# Altium PCB 400250.PcbDoc (part 2 of 2)
Units mm, origin at the board's own origin, x right, y up, seen from the top; angles counter-clockwise.
Board outline 46.04 x 15.24 mm, 2 copper layers (Top Layer, Bottom Layer), stack 1.97 mm thick; 97 components, 64 nets, 288 pads, 105 vias.
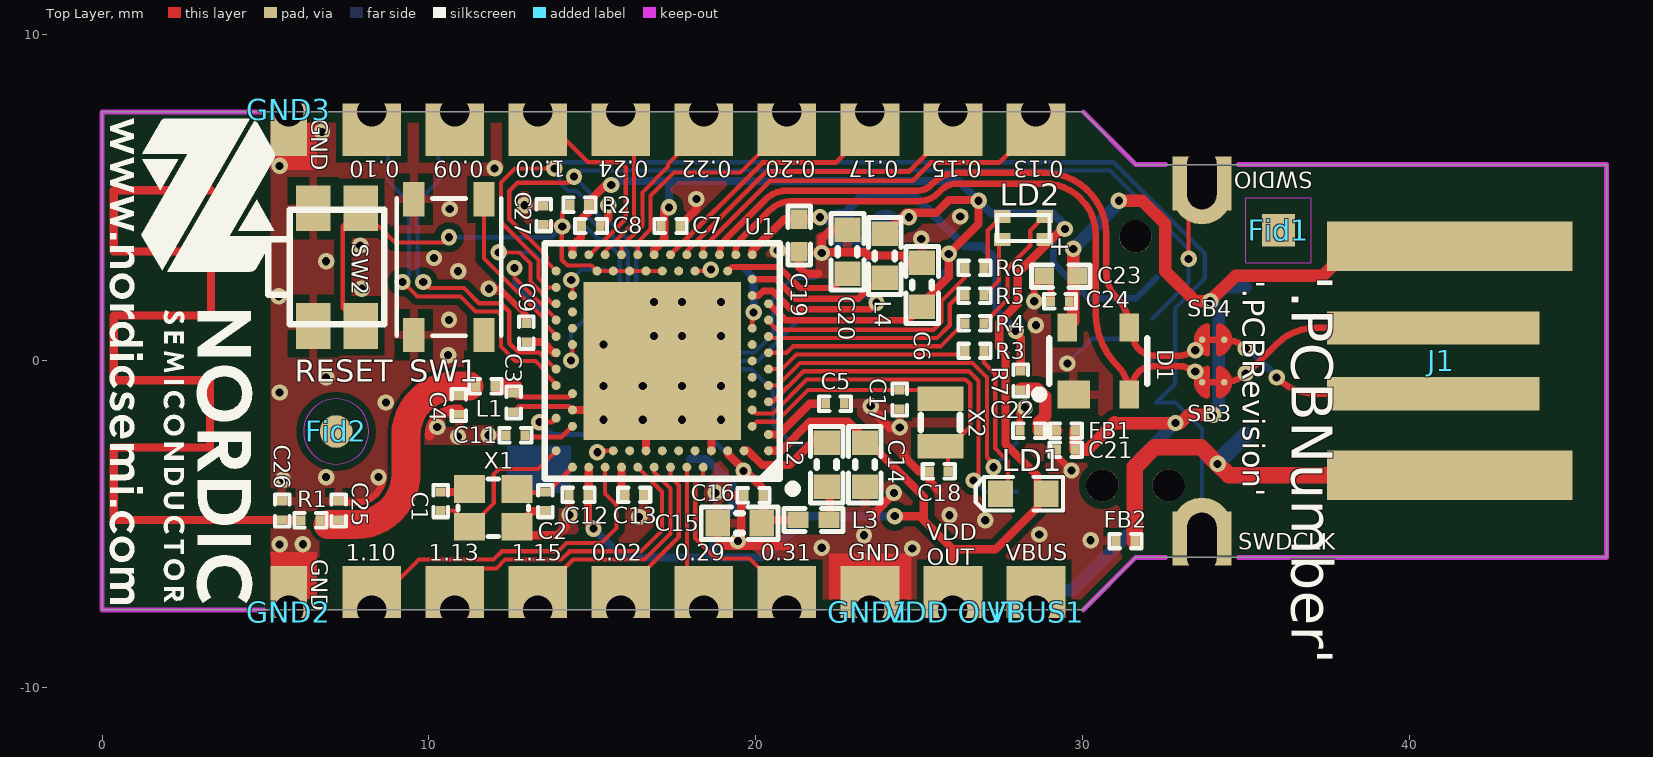
[diagram p0: Top Layer view]

## Via types
v1: diameter 0.5, hole 0.25, Top Layer to Bottom Layer, tented both sides, 105 vias

## Nets (pads, with @x,y where several pads share a name; then routed paths per layer and width w, separated by ;. In a path a pad name is that pad's centre, name@x,y a point inside that pad or via, vN(x,y) a via of type N, cw(c..) or ccw(c..) an arc to the next point about the centre after c; other vN are vias at no path point) (continued)
GND: (continued)
  other v1: 24.79,-5.74 22.022,-5.715 5.436,-5.613 6.147,-5.608 19.456,-5.512 30.251,-5.486 23.317,-5.334 28.677,-5.309 27.026,-4.877 16.434,-4.775 25.933,-4.724 14.304,-4.711 18.771,-4.039 5.537,-3.632 6.858,-3.556 8.458,-3.556 10.894,-2.311 11.825,-2.275 24.409,-2.032 10.257,-2.02 15.345,-1.8 16.545,-1.8 17.745,-1.8 18.945,-1.8 23.52,-1.382 8.687,-1.27 5.436,-0.965 15.345,-0.762 16.545,-0.762 17.745,-0.762 18.945,-0.762 6.858,-0.508 10.592,0.178 15.345,0.508 16.891,0.762 17.745,0.762 18.945,0.762 28.575,1.092 10.617,1.257 16.891,1.8 17.745,1.8 18.945,1.8 5.41,1.981 7.95,2.21 10.897,2.743 6.858,3.048 10.16,3.15 20.676,3.378 7.899,3.531 25.07,3.734 26.264,4.42 10.643,4.648 12.929,4.763 15.494,4.763 12.014,5.893 5.436,5.969 6.731,7.01
LED1: R3.1 U1.L1 | length 6.2
  Top Layer w0.127: U1.L1 20.806,-0.25 21.25,0.193 26.299,0.193 R3.1
LED2_B: R6.1 U1.U1 | length 7.5
  Top Layer w0.127: U1.U1 20.395,1.214 20.653,0.955 25.444,0.955 25.686,1.197 25.686,1.828 26.41,2.553 R6.1
LED2_G: R5.1 U1.R1 | length 6.9
  Top Layer w0.127: U1.R1 20.444,0.701 25.549,0.701 25.94,1.092 25.94,1.723 26.215,1.998 R5.1
LED2_R: R4.1 U1.N1 | length 6.3
  Top Layer w0.127: U1.N1 20.947,0.25 21.145,0.447 25.654,0.447 R4.1@26.358,1.151
NetC1_2: C1.2 X1.4 | length 0.9
  Top Layer w0.254: C1.2 11.156,-4.008 X1.4
NetC3_2: C3.2 L1.1 U1.H23 | length 2.5
  Top Layer w0.145: 12.585,-0.766 12.59,-0.771 C3.2@12.702,-0.882 ; C3.2 12.708,-1.105 14.29,-1.105 U1.H23
  Top Layer w0.508: L1.1@12.145,-0.771 12.59,-0.771
NetC9_1: C9.1 U1.N24 | length 1.1
  Top Layer w0.25: C9.1 13.49,0.579 13.819,0.25 U1.N24
NetC13_1: C13.1 U1.A18 | length 0.9
  Top Layer w0.25: U1.A18 15.895,-3.971 C13.1@16.026,-4.101
NetC20_1: C20.1 U1.AC5 | length 4.2
  Top Layer w0.184: U1.AC5 19.27,2.875 20.721,2.875 21.368,2.228 22.371,2.228 C20.1
NetD+_1: D+.1 J1.3 SB4.2 | length 7
  Top Layer w0.2: SB4.2 34.351,0.65 cw(c34.351,-0.268) v1(35,0.381) ; v1(35.941,-0.508) ccw(c37.144,0.695) 37.144,-1.006 J1.3
  Bottom Layer w0.2: D+.1@35.077,0.381 35.966,-0.508 v1@36.043,-0.508
NetD-_1: D-.1 J1.2 SB3.2 | length 7
  Top Layer w0.2: SB3.2 34.351,-0.65 ccw(c34.351,0.268) v1(35,-0.381) ccw(c35,-0.265) 35.082,-0.347 35.941,0.512 cw(c37.144,-0.691) 37.144,1.01 J1.2
NetFB2_1: FB2.1 J1.4 UGND.1 | length 12.4
  Top Layer w0.508: FB2.1 31.603,-3.246 32.207,-2.642 33.63,-2.642 v1(34.138,-3.15) 34.483,-3.495 J1.4@39.853,-3.495
  Bottom Layer w0.508: v1(34.138,-3.15) 34.138,-3.112 UGND.1
NetL2_1: L2.1 L3.2 | length 1
  Top Layer w0.25: L3.2@22.243,-4.735 22.276,-4.702 L2.1@22.276,-3.708
NetL2_2: L2.2 U1.B3 | length 3.2
  Top Layer w0.25: U1.B3 19.768,-2.75 20.204,-3.186 21.031,-3.186 21.859,-2.358 L2.2@22.276,-2.358
NetL4_2: L4.2 U1.AB2 | length 4.6
  Top Layer w0.203: U1.AB2 20.63,2.5 21.222,1.908 23.151,1.908 23.783,2.54 L4.2
NetLD1_1: LD1.1 R3.2 | length 4.9
  Top Layer w0.127: R3.2 26.98,-0.046 27.33,-0.396 27.33,-2.671 27.432,-2.772 27.432,-2.781 27.72,-3.069 27.72,-4.064 LD1.1
NetLD2_1: LD2.1 R4.2 | length 4
  Top Layer w0.127: R4.2 27.703,1.874 27.703,2.836 28.403,3.537 28.403,3.993 28.825,4.414 LD2.1
NetLD2_2: LD2.2 R5.2 | length 1.9
  Top Layer w0.127: R5.2 27.449,2.466 27.449,3.619 LD2.2
NetLD2_3: LD2.3 R6.2 | length 1.8
  Top Layer w0.127: R6.2 27.104,2.968 27.104,3.993 27.525,4.414 LD2.3
NetSB1_2: SB1.2 SB2.1 U1.Y2 | length 7.6
  Top Layer w0.203: U1.Y2 20.091,2 20.233,2.142 20.521,2.142 21.085,1.578 23.498,1.578 v1(23.698,1.778)
  Bottom Layer w0.254: SB2.1@22.606,3.681 23.362,3.681 ; v1(23.698,1.778) 23.38,2.096 23.38,3.663 23.362,3.681 ; SB1.2 23.907,3.681 23.692,3.681 23.362,3.681
P0.00/XL1: C17.1 U1.D2 X2.1 | length 6.3
  Top Layer w0.127: U1.D2 20.036,-1.859 20.634,-1.859 21.606,-0.887 24.402,-0.887 C17.1 25.394,-0.894 X2.1
P0.01/XL2: C18.1 U1.F2 X2.2 | length 10.5
  Top Layer w0.127: U1.F2 20,-1.605 20.529,-1.605 21.565,-0.569 26.426,-0.569 26.568,-0.711 26.568,-2.007 25.97,-2.605 X2.2 25.888,-2.839 C18.1
P0.02: 0.02.1 U1.A12 | length 5.2
  Top Layer w0.127: 0.02.1@15.875,-7.62 15.875,-7.163 17.646,-5.391 17.646,-3.792 17.395,-3.541 U1.A12
P0.04: 0.04.1 U1.J1 | length 11
  Top Layer w0.127: U1.J1 20.666,-0.75 21.355,-0.061 26.636,-0.061 27.076,-0.501 27.076,-2.946 27.28,-3.15 v1(27.28,-3.251)
  Bottom Layer w0.127: v1(27.28,-3.251) 27.28,-3.22 0.04.1
P0.09: 0.09.1 C28.2 U1.L24 | length 11.9
  Top Layer w0.127: v1(9.83,2.413) 10.016,2.227 11.073,2.227 11.535,1.765 12.201,1.765 12.462,1.504 12.462,0.542 12.75,0.253 13.369,0.253 13.873,-0.25 U1.L24 ; 0.09.1@10.795,7.188 10.795,7.62
  Bottom Layer w0.127: v1(9.83,2.413) 9.652,2.591 9.652,4.869 10.295,5.512 10.295,7.12 10.795,7.62
P0.10: 0.10.1 C29.1 U1.J24 | length 12.8
  Top Layer w0.127: 0.10.1@8.255,7.188 8.255,7.62 ; v1(9.195,2.413) 9.207,2.413 9.647,1.973 10.968,1.973 11.43,1.511 12.096,1.511 12.208,1.399 12.208,0.437 12.645,-0.001 13.264,-0.001 13.564,-0.3 13.564,-0.382 13.895,-0.714 U1.J24
  Bottom Layer w0.127: 8.255,7.62 8.755,7.12 8.755,5.512 9.398,4.869 9.398,2.616 v1(9.195,2.413)
P0.11: 0.11.1 U1.T2 | length 1.9
  Top Layer w0.127: U1.T2 19.895,1.444 v1(19.938,1.487)
  Bottom Layer w0.25: 0.11.1@19.685,2.794 19.938,2.541 v1(19.938,1.487)
P0.13: 0.13.1 U1.AD8 | length 12.4
  Top Layer w0.15: U1.AD8 18.395,3.467 20.442,5.514 24.803,5.514 25.357,6.068 27.455,6.068 28.575,7.188 28.575,7.62
P0.14: 0.14.1 U1.AC9 | length 0.5
  Top Layer w0.127: U1.AC9 18.589,2.75 v1(18.632,2.793)
  Bottom Layer w0.25: v1(18.632,2.793) v1(18.632,2.793)
P0.15: 0.15.1 U1.AD10 | length 10.3
  Top Layer w0.15: U1.AD10 17.895,3.358 20.328,5.791 24.689,5.791 26.035,7.137 26.035,7.62
P0.17: 0.17.1 U1.AD12 | length 8.2
  Top Layer w0.15: U1.AD12 20.213,6.068 22.451,6.068 23.495,7.112 23.495,7.62
P0.20: 0.20.1 U1.AD16 | length 7.5
  Top Layer w0.127: U1.AD16 16.395,3.636 16.789,4.03 16.789,5.054 17.501,5.766 19.535,5.766 20.955,7.185 20.955,7.62
P0.22: 0.22.1 U1.AD18 | length 5.4
  Top Layer w0.127: U1.AD18 15.895,3.495 16.535,4.135 16.535,5.159 17.323,5.947 17.323,6.02 18.415,7.112 18.415,7.62
P0.24: 0.24.1 U1.AD20 | length 4.9
  Top Layer w0.127: U1.AD20 15.395,3.355 16.281,4.24 16.281,7.214 15.875,7.62
P0.26: 0.26.1 U1.G1 | length 11.5
  Top Layer w0.127: U1.G1 20.525,-1.25 21.46,-0.315 26.531,-0.315 26.822,-0.606 26.822,-3.505 v1(26.67,-3.658)
  Bottom Layer w0.127: v1(26.67,-3.658) 27.012,-4 0.26.1
P0.29: 0.29.1 U1.A10 | length 4.6
  Top Layer w0.127: U1.A10 17.9,-3.255 17.9,-7.105 0.29.1@18.415,-7.62
P0.31: 0.31.1 U1.A8 | length 6.2
  Top Layer w0.127: U1.A8 18.395,-3.525 18.154,-3.766 18.154,-5.429 18.771,-6.045 19.812,-6.045 20.955,-7.188 0.31.1@20.955,-7.62
P1.00: 1.00.1 U1.AD22 | length 6.6
  Top Layer w0.127: 13.335,7.62 14.875,6.08 15.866,6.08 16.027,5.919 16.027,4.345 14.931,3.25 U1.AD22
P1.01: 1.01.1 U1.Y23 | length 1.6
  Top Layer w0.127: v1(14.357,2.477) 14.395,2.439 U1.Y23
  Bottom Layer w0.127: v1(14.357,2.477) 14.674,2.794 1.01.1@15.367,2.794
P1.02: 1.02.1 U1.W24 | length 4.2
  Top Layer w0.127: v1(12.141,3.321) 12.771,3.321 13.106,2.985 13.106,2.434 13.79,1.75 U1.W24
  Bottom Layer w0.127: v1(12.141,3.321) 13.179,3.321 1.02.1
P1.04: 1.04.1 U1.U24 | length 3.8
  Top Layer w0.127: v1(12.624,2.845) 12.624,2.557 13.895,1.286 U1.U24
  Bottom Layer w0.127: v1(12.624,2.845) 12.624,2.376 1.04.1
P1.07: 1.07.1 U1.P23 | length 2.3
  Top Layer w0.127: v1(14.352,0.013) 14.395,0.056 U1.P23
  Bottom Layer w0.127: v1(14.352,0.013) 14.352,0.852 1.07.1
P1.10: 1.10.1 U1.A20 | length 10.6
  Top Layer w0.127: 1.10.1@8.255,-7.62 8.255,-7.518 9.694,-6.08 11.976,-6.08 12.23,-5.826 13.954,-5.826 14.208,-5.572 15.282,-5.572 15.739,-5.114 15.739,-4.406 15.395,-4.062 U1.A20
P1.11: 1.11.1 U1.B19 | length 0.5
  Top Layer w0.145: v1(15.158,-2.793) 15.201,-2.75 U1.B19
P1.13: 1.13.1 U1.A16 | length 9.8
  Top Layer w0.127: 1.13.1@10.795,-7.62 10.795,-7.188 11.633,-6.35 12.065,-6.35 12.335,-6.08 14.059,-6.08 14.313,-5.826 16.494,-5.826 17.136,-5.183 17.136,-4.219 17.138,-4.216 17.138,-4.003 16.395,-3.259 U1.A16
P1.15: 1.15.1 U1.A14 | length 7.5
  Top Layer w0.127: 1.15.1@13.335,-7.62 13.335,-7.163 14.418,-6.08 16.599,-6.08 17.392,-5.286 17.392,-3.898 16.895,-3.4 U1.A14
RESET: C27.2 P1.10 R2.1 SW2.1 U1.AC13 U1.AC15 U1.AC17 U1.AC19 U1.AC21 | length 29.2
  Top Layer w0.127: SW2.1@7.913,1.07 7.366,1.617 7.366,4.123 7.913,4.67 8.964,3.619 10.452,3.619 v1(10.617,3.785) ; C27.2 14.026,4.173 v1(14.084,4.115) 14.084,4.539 R2.1 ; v1@14.067,3.942 14.067,3.096 14.241,2.922 14.973,2.922 U1.AC21 U1.AC19 U1.AC17 U1.AC15 U1.AC13
  Bottom Layer w0.127: v1(10.617,3.785) 13.754,3.785 v1(14.084,4.115) 14.8,4.115 15.207,3.708 15.374,3.708 15.84,3.242 15.84,0.394 16.488,-0.254 19.875,-0.254 20.535,-0.914 20.535,-1.943 21.133,-2.54 P1.10
RF: C4.2 C25.1 L1.2 R1.1 | length 7.3
  Top Layer w0.889: 6.909,-5.004 7.772,-5.004 ccw(c7.772,-3.48) 9.296,-3.48 9.296,-2.286 cw(c10.82,-2.286) 10.82,-0.762 11.227,-0.762
SW1: SW1.1 U1.R24 | length 5.1
  Top Layer w0.127: SW1.1 11.692,3.13 13.567,1.255 13.567,1.114 U1.R24@13.895,0.786
SWDCLK: J2.4 P1.4 pad.3@33.655,-5.08 SWDCLK.1 U1.AA24 | length 51
  Top Layer w0.127: v1(13.843,5.893) 12.637,5.893 12.208,5.463 12.208,4.243 13.36,3.09 13.36,2.539 13.65,2.25 U1.AA24
  Bottom Layer w0.127: P1.4 21.336,1.27 20.066,0 16.593,0 16.094,0.499 16.094,3.347 15.582,3.86 15.479,3.962 15.312,3.962 14.8,4.475 14.8,4.92 14.521,5.198 14.257,5.198 13.999,5.456 13.999,5.736 v1(13.843,5.893) 14.03,6.08 30.954,6.08 33.744,3.289 33.744,2.527 32.842,1.626 32.842,-0.686 J2.4 32.843,-1.27 33.655,-2.082 33.655,-5.08 33.655,-5.56 33.655,-6.01
SWDIO: J2.2 P1.2 pad.3@33.655,5.08 SWDIO.1 U1.AC24 | length 44.3
  Top Layer w0.127: U1.AC24 13.614,3.031 13.614,3.196 12.462,4.348 12.462,5.197 12.717,5.452 14.253,5.452 v1(14.44,5.639) ; v1(33.249,3.124) 33.249,5.604 33.655,6.01
  Bottom Layer w0.127: P1.2@21.819,2.54 21.125,2.54 20.535,1.951 20.535,0.829 19.961,0.254 16.699,0.254 16.348,0.604 16.348,3.452 15.584,4.216 15.417,4.216 15.054,4.58 15.054,5.025 v1(14.44,5.639) 14.627,5.826 30.848,5.826 33.249,3.425 v1(33.249,3.124) 33.249,2.398 J2.2@32.131,1.28 ; SWDIO.1@33.655,5.639 33.655,6.01
VBUS: C22.2 FB1.2 R7.2 | length 2.5
  Top Layer w0.381: R7.2@28.114,-0.855 28.622,-0.855 28.867,-1.1 28.867,-1.68 28.657,-1.89 C22.2 ; C22.2 FB1.2
VBUS': C21.2 C23.2 C24.2 D1.4 FB1.1 J1.1 J2.5 VBUS1.1 VBUS2.1 | length 35.5
  Top Layer w0.381: D1.4 29.718,1.213 v1(29.718,3.429) ; FB1.1 C21.2 30.15,-2.718 30.988,-1.88 31.008,-1.9 v1(32.85,-1.9) 33,-1.9 33.25,-1.65 v1(34,-1.65) ; v1(31.115,4.902) 31.824,4.902 32.537,4.189 32.537,2.743 33.452,1.829 v1(33.909,1.829) 34.684,2.603 37.351,2.603 38.257,3.51 J1.1
  Bottom Layer w0.381: VBUS1.1@28.575,-7.62 29.185,-7.01 29.693,-7.01 31.547,-5.156 31.547,-3.203 v1(32.85,-1.9) ; v1(29.718,3.429) 31.115,4.826 v1(31.115,4.902) ; v1(34,-1.65) 34.175,-1.475 34.175,1.563 v1(33.909,1.829) 34.33,2.25 VBUS2.1
VBUS_nRF: C19.1 R7.1 SB2.2 U1.AD2 | length 12.9
  Top Layer w0.25: U1.AD2 19.895,3.36 20.879,4.343 21.92,4.343 v1(21.971,4.394)
  Top Layer w0.254: v1(27.955,0.925) 27.955,0.858 28.114,0.699 R7.1
  Bottom Layer w0.254: v1(21.971,4.394) 22.598,4.394 SB2.2 23.335,5.131 24.787,5.131 26.413,3.505 26.949,3.505 27.381,3.073 27.381,1.499 v1(27.955,0.925)
VDD_nRF: "VDD nRF.1" "VDD OUT.1" C6.1 C7.1 C8.1 C12.1 C14.1 J2.1 L4.1 LD1.2 LD2.4 P1.1 R2.2 SB1.1 U1.A22 U1.AD14 U1.AD23 U1.B1 U1.W1 | length 78.4
  Top Layer w0.203: U1.W1 20.413,1.75 20.915,1.247 24.692,1.247 C6.1
  Top Layer w0.25: U1.AD23 14.395,3.513 14.661,3.779 C8.1@14.661,4.129 ; C8.1 14.676,4.338 14.992,4.654 14.992,4.97 15.406,5.385 v1(15.583,5.385) ; C12.1 14.869,-4.963 v1(15.037,-5.131) ; C12.1@14.895,-4.101 U1.A22 ; U1.AD14 16.895,3.397 17.201,3.703 v1@17.201,4.668 ; U1.B1 20.77,-2.75 21.666,-1.854 22.835,-1.854 25.146,-4.166 25.146,-4.877
  Top Layer w0.254: L4.1 24.593,4.531 25.519,4.531 25.911,4.924 26.801,4.924 v1(26.822,4.902) 26.822,4.191 v1(25.908,3.277) 25.908,2.565 25.095,1.753 C6.1 ; v1(24.257,-4.75) 25.019,-4.75 26.035,-5.766 ; 26.035,-7.442 26.035,-5.766 ; v1@29.432,4.095 28.02,2.683 28.02,1.742 27.451,1.173 27.451,0.422 27.648,0.225 27.648,-2.539 28.626,-3.517 28.626,-4.482 27.342,-5.766 26.035,-5.766
  Bottom Layer w0.203: v1@29.464,4.14 29.108,3.785 29.108,2.997 30.188,1.918 31.636,1.918 J2.1
  Bottom Layer w0.25: v1(15.583,5.385) 15.708,5.51 17.374,5.51 ; v1(17.348,4.699) 17.348,5.485 17.374,5.51 ; v1@29.464,4.14 29.083,4.521 27.203,4.521 v1(26.822,4.902) 26.215,5.51 17.374,5.51
  Bottom Layer w0.254: v1(15.037,-5.131) 15.922,-6.016 18.72,-6.016 ; 18,-3 18.494,-3 19.304,-3.81 19.304,-4.536 18.72,-5.12 18.72,-6.016 ; SB1.1@24.028,4.376 24.671,4.376 v1(24.689,4.394) ; v1(24.257,-4.75) 21.591,-4.75 20.325,-6.016 18.72,-6.016 ; P1.1@25.648,2.54 25.908,2.8 v1(25.908,3.277)
  other v1: 29.464,4.039
XC1: C1.1 U1.B24 X1.1 | length 5.7
  Top Layer w0.127: C1.1 10.749,-4.578 X1.1 X1.1@10.86,-5.071 ; X1.1@11.242,-4.93 11.262,-4.95 11.262,-5.071 11.989,-4.344 11.989,-3.455 12.138,-3.305 13.34,-3.305 U1.B24
XC2: C2.1 U1.A23 X1.3 | length 2.1
  Top Layer w0.15: X1.3@12.692,-3.78 12.932,-4.02 13.568,-4.02 13.625,-4.02 U1.A23
pads on no net: Fid1.0 Fid2.0 J2.0 J2.6 J2.7 J2.8 J2.9 J2.10 P1.6 P1.7 P1.8 SW1.0 U1.AC11 U1.B9 U1.B11 U1.B13 U1.B17 U1.H2 U1.K2 U1.M2 U1.P2 U1.T23 U1.V23

## Polygon pours and split planes (outlines as drawn)
GND on Bottom Layer "Bottom_Layer-GND" (solid, remove dead copper, pour order 37): -2.54,-10.16 -2.54,10.16 48.26,10.16 48.26,-10.16
GND on Top Layer "Top_Layer-GND" (solid, remove dead copper, pour order 39): -2.54,-10.226 -2.54,10.16 48.26,10.16 48.26,-10.226

## Keep-outs
Keep-Out Layer:
  lines w0.15: 30.027,-7.62 31.637,-6.01 32.537,-6.01 ; 30.027,7.62 31.637,6.01 32.537,6.01 ; 34.773,-6.01 46.039,-6.01 46.039,6.01 34.773,6.01
  lines w0.152: 4.953,-7.62 0,-7.62 0,7.62 4.953,7.62

## Other copper
Top Layer:
  rectangle net GND: 22.25,-7.294 24.765,-5.893
  rectangle net GND: 5.156,-7.29 6.579,-5.842
  rectangle net GND: 5.156,5.842 6.579,7.29
  pour cut-out: 6.651,-7.417 9.909,-7.417 9.909,-5.036 6.651,-5.036
  pour cut-out: 9.855,-2.565 9.855,-6.01 13.972,-6.01 13.972,-2.565
  pour cut-out: 23.749,-2.069 23.749,-3.569 21.249,-3.569 21.249,-2.069
  pour cut-out: 30.44,-7.294 30.44,-10.225 4.483,-10.226 4.483,-7.294
  pour cut-out: 4.693,7.29 4.693,7.986 31.394,7.986 31.394,7.29
  pour cut-out: 32.039,-6.01 32.039,6.01 46.039,6.01 46.039,-6.01
  pour cut-out: -0.508,9.104 5.156,9.104 5.156,-8.727 -0.508,-8.727
  pour cut-out: 11.069,0.325 13.813,0.325 13.813,-1.968 11.069,-1.968
  pour cut-out: 16.895,0.75 16.895,-0.75 14.395,-0.75 14.395,0.75
  pour cut-out: 14.572,3.987 15.632,2.927 13.865,1.159 12.804,2.22
Bottom Layer:
  rectangle net GND: 22.25,-7.294 24.765,-5.893
  rectangle net GND: 5.156,-7.29 6.579,-5.842
  rectangle net GND: 5.156,5.842 6.579,7.29
  rectangle net GND: 12.395,-4.039 14.351,-2.591
  pour cut-out: 6.706,-8.103 6.69,-8.087 6.69,-5.381 14.759,-5.381 14.759,-8.103
  pour cut-out: 30.44,-7.294 30.44,-10.225 4.223,-10.226 4.223,-7.294
  pour cut-out: 4.743,7.29 4.743,7.986 31.394,7.986 31.394,7.29
  pour cut-out: -0.508,9.104 5.156,9.104 5.156,-8.727 -0.508,-8.727

## Silkscreen, mask and mechanical layers (free items; w line width, h text height)
Top Overlay:
  drawing of 43 lines, arcs and shapes, not listed
  text "'.PCBNumber'" at 35.992,2.616 h2.16 r270
  text "'.PCBRevision'" at 34.9,2.464 h0.69 r270
  text "RESET" at 5.893,-0.635 h0.69
  text "VDD / OUT" at 25.241,-6.248 h0.51
Bottom Overlay:
  lines w0.2: 5.319,-2.5 ccw(c6.319,-2.5) 6.319,-3.5 11.319,-3.5 ccw(c11.319,-2.5) 12.319,-2.5 12.319,2.5 ccw(c11.319,2.5) 11.319,3.5 6.319,3.5 ccw(c6.319,2.5) 5.319,2.5 5.319,-2.5
  text "LABEL" at 8.342,-2.281 h1.02 r270
  text "VDD / nRF" at 17.137,-5.455 h0.51 r270
  text "nRF52840-Dongle" at 0.813,-7.188 h2.41 r270
Board Outline:
  the board outline again, w0.152
Bottom Assembly:
  drawing of 40 lines, arcs and shapes, not listed
Placement:
  lines w0.152: 32.039,-6.01 32.039,6.01

## Dimensions
31.637,-6.01 to 46.039,-6.01 on Dimension
0,-7.62 to 46.039,-6.01 on Dimension
0,-7.62 to 30.027,-7.62 on Dimension
46.039,6.01 to 46.039,-6.01 on Dimension
0,7.62 to 0,-7.62 on Dimension

## Text inside footprints (layer, text, board x,y; h text height)
J1: Placement "Card edge" at 46.689,3.05 h1.57 r270; PCB Info "SEE DETAIL A" at 44.862,24.576 h1.91 r270; PCB Info "0.025in [0.625mm]" at 77.29,24.79 h2.29 r270; PCB Info "DETAIL A" at 105.764,-0.044 h3.81 r270; PCB Info "o" at 94.332,-21.868 h1.22 r270; PCB Info "45" at 91.792,-17.741 h2.29 r270; PCB Info "0.030in [0.75mm]" at 58.139,-19.094 h2.29 r270
LD2: Top Overlay "+" at 29.569,3.139 h0.6 r90
P1: Bottom Overlay "1" at 25.375,3.505 h1.02 r270
"VDD nRF": Bottom Assembly "VDD / nRF" at 17.553,-4.85 h0.3 r270